# EAGLE board Ex 9BlueLed1RedLedPanel (EAGLE 7.6.0)
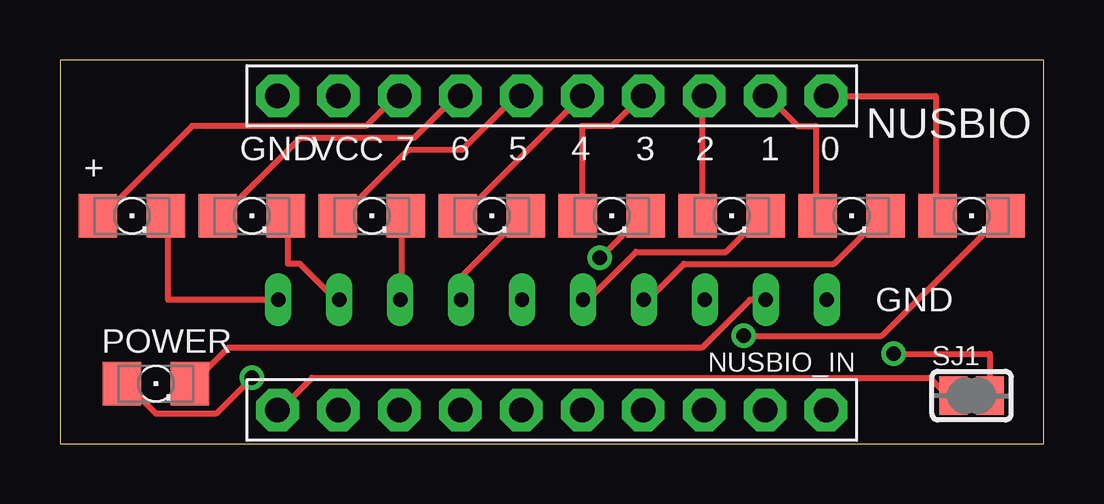
[diagram p0: board, top side]
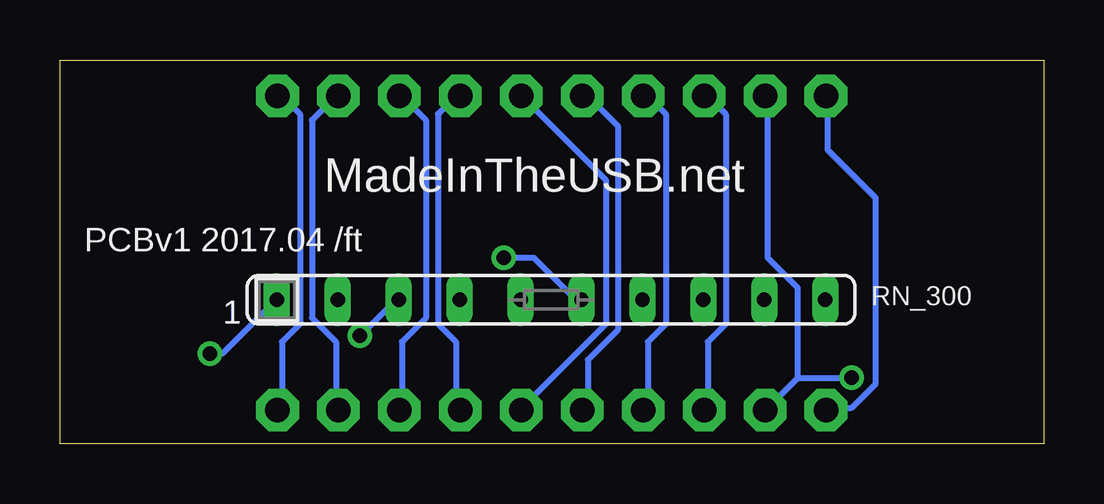
[diagram p1: board, bottom side, seen from below]

Size 41 x 16 mm. Coordinates in mm from the lower left corner, seen from the top.
Outline: 0,0 41,0 41,16 0,16 0,0
Copper layers (1*16): Top 0.035mm / dielectric 1.5mm / Bottom 0.035mm
Design rules "default": minimum track width 10mil, minimum drill 24mil, track to track 8mil, track to pad 8mil, pad to pad 8mil, via to via 8mil, smd to smd 8mil, copper to edge 40mil, drill to drill 8mil, minimum pad ring 10mil, minimum via ring 8mil, stop-mask expansion 4mil, vias tented up to drill 0mil, thermal gap 10mil

## Footprints (pad centres in the part's own frame; a part is rotated, then mirrored left to right if it is on the bottom)
1206 = smd 1.6 x 1.803: A -1.422,0; C 1.422,0
1X10-BIG = drill 1.016 pad 1.778 octagon: 1 -11.43,0; 2 -8.89,0; 3 -6.35,0; 4 -3.81,0; 5 -1.27,0; 6 1.27,0; 7 3.81,0; 8 6.35,0; 9 8.89,0; 10 11.43,0
SIP10 = drill 0.6 long: 1 -11.46,0; 2 -8.92,0; 3 -6.38,0; 4 -3.84,0; 5 -1.3,0; 6 1.24,0; 7 3.78,0; 8 6.32,0; 9 8.86,0; 10 11.4,0
SOLDERJUMPER_REFLOW_NOPASTE = smd 1.168 x 1.6: 1 -0.762,0; 2 0.762,0

## Placement (x,y rotation side)
LED0  [1206]  38,9.5 0 top
LED1  [1206]  33,9.5 0 top
LED2  [1206]  28,9.5 0 top
LED3  [1206]  23,9.5 0 top
LED4  [1206]  18,9.5 0 top
LED5  [1206]  13,9.5 0 top
LED6  [1206]  8,9.5 0 top
LED7  [1206]  3,9.5 0 top
NUSBIO  PINHD-1X10  [1X10-BIG]  20.5,14.5 180 top
NUSBIO_IN  PINHD-1X10  [1X10-BIG]  20.5,1.4 180 top
POWER  [1206]  4,2.5 0 top
RN_300  [SIP10]  20.5,6 0 bottom
SJ1  [SOLDERJUMPER_REFLOW_NOPASTE]  38,2 0 top

## Library data of the parts
LED0 LED1-LED7 NUSBIO NUSBIO_IN POWER = adafruit
RN_300 = resistor-sip
SJ1 = microbuilder

## Nets
GND: NUSBIO.10 NUSBIO_IN.10 SJ1.1
GPIO_0: LED0.A NUSBIO.1 NUSBIO_IN.1
GPIO_1: LED1.A NUSBIO.2 NUSBIO_IN.2
GPIO_2: LED2.A NUSBIO.3 NUSBIO_IN.3
GPIO_3: LED3.A NUSBIO.4 NUSBIO_IN.4
GPIO_4: LED4.A NUSBIO.5 NUSBIO_IN.5
GPIO_5: LED5.A NUSBIO.6 NUSBIO_IN.6
GPIO_6: LED6.A NUSBIO.7 NUSBIO_IN.7
GPIO_7: LED7.A NUSBIO.8 NUSBIO_IN.8
N$1: POWER.C RN_300.2
N$2: RN_300.1 SJ1.2
N$3: LED7.C RN_300.10
N$4: LED6.C RN_300.9
N$5: LED5.C RN_300.8
N$6: LED4.C RN_300.7
N$7: LED3.C RN_300.6
N$8: LED2.C RN_300.5
N$9: LED1.C RN_300.4
N$10: LED0.C RN_300.3
VCC: NUSBIO.9 NUSBIO_IN.9 POWER.A

## Tracks (layer width: path | path; a pad name or v marks a point on that pad's centre or on a via)
GND
  Top 0.254: SJ1.1 37,2 36.25,2.75 10.5,2.75 9.25,1.5 NUSBIO_IN.10
  Bottom 0.254: NUSBIO.10 9,14.5 9,12.25 7,10.25 7,2.5 8,1.5 9,1.5 NUSBIO_IN.10
GPIO_0
  Top 0.254: NUSBIO.1 36.5,14.5 36.5,9.5 LED0.A
  Bottom 0.254: NUSBIO_IN.1 31.75,1.5 31.75,4.25 31,5 31,13.75 31.75,14.5 NUSBIO.1
GPIO_1
  Top 0.254: LED1.A 31.5,9.5 31.5,13.25 30.75,13.25 29.5,14.5 NUSBIO.2
  Bottom 0.254: NUSBIO_IN.2 29.5,1.5 29.5,4.25 30.5,5.25 30.5,13.5 29.5,14.5 NUSBIO.2
GPIO_2
  Top 0.254: LED2.A 26.75,9.5 26.75,14.5 NUSBIO.3
  Bottom 0.254: NUSBIO_IN.3 26.75,1.5 26.75,4.25 25.75,5.25 25.75,13.5 26.75,14.5 NUSBIO.3
GPIO_3
  Top 0.254: LED3.A 21.75,9.5 21.75,13.25 23,13.25 24.25,14.5 NUSBIO.4
  Bottom 0.254: NUSBIO_IN.4 24.5,1.5 24.5,4.25 25.25,5 25.25,13.75 24.5,14.5 NUSBIO.4
GPIO_4
  Top 0.254: LED4.A 16.75,9.5 21.75,14.5 NUSBIO.5
  Bottom 0.254: NUSBIO_IN.5 21.75,1.5 18.25,5 18.25,11 21.75,14.5 NUSBIO.5
GPIO_5
  Top 0.254: LED5.A 11.75,9.5 14.5,12.25 16.75,12.25 19,14.5 NUSBIO.6
  Bottom 0.254: NUSBIO_IN.6 19,1.5 19,3.5 17.75,4.75 17.75,13.25 19,14.5 NUSBIO.6
GPIO_6
  Top 0.254: LED6.A 6.75,9.5 10,12.75 14.75,12.75 16.5,14.5 NUSBIO.7
  Bottom 0.254: NUSBIO_IN.7 16.5,1.5 16.5,4.25 15.75,5 15.75,13.75 16.5,14.5 NUSBIO.7
GPIO_7
  Top 0.254: LED7.A 1.75,9.5 5.5,13.25 12.75,13.25 14,14.5 NUSBIO.8
  Bottom 0.254: NUSBIO_IN.8 14,1.5 14,4.25 13.25,5 13.25,13.75 14,14.5 NUSBIO.8
N$1
  Top 0.254: RN_300.2 28.75,6 26.75,4 7,4 5.5,2.5 POWER.C
N$2  (via drill 0.61)
  Top 0.254: v34.75,3.75 38.75,3.75 SJ1.2
  Bottom 0.254: v34.75,3.75 34.25,3.75 32,6 RN_300.1
N$3
  Top 0.254: RN_300.10 4.5,6 4.5,9.5 LED7.C
N$4
  Top 0.254: LED6.C 9.5,9.5 9.5,7.5 10,7.5 11.5,6 RN_300.9
N$5
  Top 0.254: LED5.C 14.25,9.5 14.25,6 RN_300.8
N$6
  Top 0.254: LED4.C 19.25,9.5 16.75,7 16.75,6 RN_300.7
N$7  (via drill 0.61)
  Top 0.254: v22.5,7.75 24.25,9.5 LED3.C
  Bottom 0.254: v22.5,7.75 21.25,7.75 19.5,6 RN_300.6
N$8
  Top 0.254: LED2.C 29.25,9.5 27.75,8 24,8 22,6 RN_300.5
N$9
  Top 0.254: LED1.C 34.25,9.5 32.25,7.5 26,7.5 24.5,6 RN_300.4
N$10  (via drill 0.61)
  Top 0.254: v28.5,4.5 34.25,4.5 39.25,9.5 LED0.C
  Bottom 0.254: v28.5,4.5 27,6 RN_300.3
VCC  (via drill 0.61)
  Top 0.254: v8,2.75 6.5,1.25 4,1.25 2.75,2.5 POWER.A
  Bottom 0.254: 10.25,2.75 v8,2.75 | 10.25,2.75 11.5,1.5 NUSBIO_IN.9 | 10.25,2.75 10.25,6.5 11.5,7.75 11.5,14.5 NUSBIO.9

## Text on the board
tNames: GND | VCC | 7 | 6 | 5 | 4 | 3 | 2 | 1 | 0 | + | GND | NUSBIO_IN
bNames: MadeInTheUSB.net | PCBv1 2017.04 /ft